# Altium PCB Sensor_PCB_S201.PcbDoc
Units mil, origin at the board's own origin, x right, y up, seen from the top; angles counter-clockwise.
Board outline 787.4 x 787.4 mil, 2 copper layers (1-SIG-TOP, 2-SIG_BOT), stack 31.496 mil thick; 38 components, 17 nets, 86 pads, 32 vias.
Unrouted connection lines stored in the file: 44.
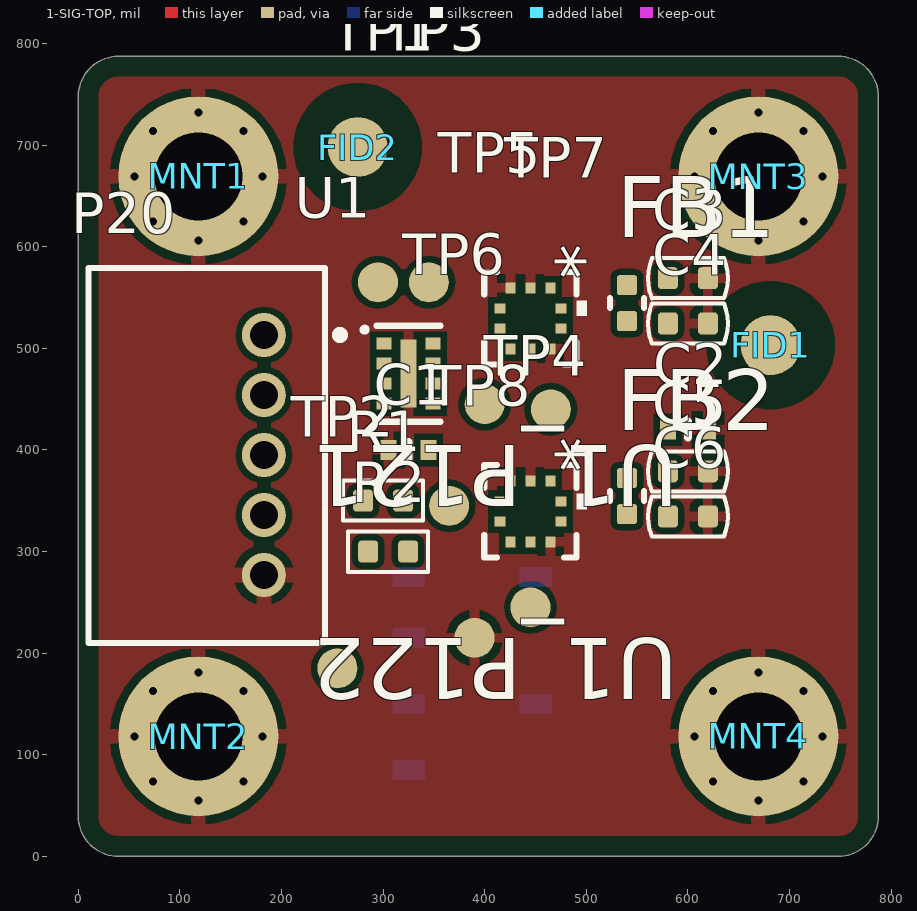
[diagram p0: 1-SIG-TOP view]
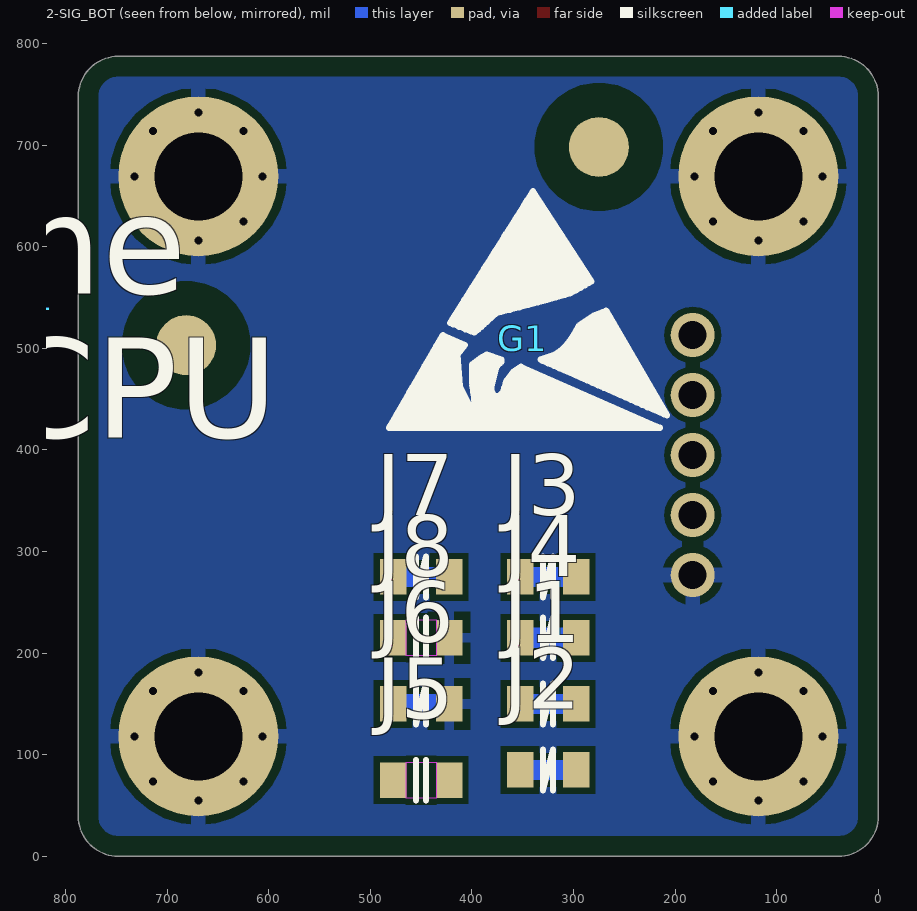
[diagram p1: 2-SIG_BOT view, seen from below]

## Layer stack, top to bottom
Top Solder: solder mask 0.3937, Solder Resist, Dk 3.5
1-SIG-TOP: signal copper 1.378
Dielectric 1: core 28.7402, FR-4, Dk 4.2
2-SIG_BOT: signal copper 1.378
Bottom Solder: solder mask 0.3937, Solder Resist, Dk 3.5

## Board outline
0,39.37 0,748.03 cw(c39.37,748.03) 39.37,787.4 748.03,787.4 cw(c748.03,748.03) 787.4,748.03 787.4,39.37 cw(c748.03,39.37) 748.03,0 39.37,0 cw(c39.37,39.37)

## Design rules (kind name [scope] priority, off if disabled: settings)
BoardOutlineClearance BoardOutlineClearance_LayerStack [WithinRoom('PCB_Stackup')] p1: gap=0 ignorepadtopadclearanceinfootprint=FALSE
BoardOutlineClearance BoardOutlineClearance_LayerNames [WithinRoom('Layer_Names')] p2: gap=0 ignorepadtopadclearanceinfootprint=FALSE
BoardOutlineClearance BoardOutlineClearance_uSD_Slot [HasFootprintPad('5025700893','0')] p3: gap=0 ignorepadtopadclearanceinfootprint=FALSE
BoardOutlineClearance BoardOutlineClearance_nanoSIM_Slot [HasFootprintPad('1042240820_MOL','G4') or HasFootprintPad('1042240820_MOL','G1') or ((ObjectKind = 'Fill') and HasFootprint('1042240820_MOL'))] p4: gap=0 ignorepadtopadclearanceinfootprint=FALSE
BoardOutlineClearance BoardOutlineClearance_Overlays [OnBottomSilkscreen or OnTopSilkscreen] p5: gap=0 ignorepadtopadclearanceinfootprint=FALSE
BoardOutlineClearance [All] p6: gap=19.68 ignorepadtopadclearanceinfootprint=FALSE
Clearance Clearance_InnerLayers [OnLayer('4-SIG-HOR') or OnLayer('5-SIG-VERT')] p1: gap=6 ignorepadtopadclearanceinfootprint=TRUE except(8: Arc-SMDPad Arc-THPad Arc-Via Arc-Hole Track-SMDPad Track-THPad Track-Via Track-Hole THPad-THPad THPad-Via THPad-Fill THPad-Poly THPad-Region THPad-Hole Via-Via Via-Fill Via-Poly Via-Region Via-Hole Fill-Hole Poly-Hole Region-Hole)
Clearance [All] p2: gap=6 ignorepadtopadclearanceinfootprint=FALSE
ComponentClearance ComponentClearance_NetTie [HasFootprint('Net Tie 6x30mil') vs not HasFootprint('Net Tie 6x30mil')] p1: gap=0 collisioncheckmode=3 verticalgap=0 showdistances=FALSE
ComponentClearance ComponentClearance_PCB_Stackup [WithinRoom('PCB_Stackup')] p2: gap=0 collisioncheckmode=3 verticalgap=0 showdistances=FALSE
ComponentClearance ComponentClearance_TagConnect [HasFootprint('TC2030-IDC-NL') or HasFootprint('TC2050-IDC-NL')] p3: gap=0 collisioncheckmode=3 verticalgap=0 showdistances=FALSE
ComponentClearance ComponentClearance_Displays [HasFootprint('QG-2864KSWEG01_FLIPPED') vs HasFootprint('CONN_0524352271')] p4: gap=0 collisioncheckmode=3 verticalgap=0 showdistances=FALSE
ComponentClearance [All] p5: gap=12 collisioncheckmode=3 verticalgap=40 showdistances=FALSE
DiffPairsRouting [All] p1: maxlimit=6 minlimit=5 mostfreqgap=6 toplayer_minwidth=5 toplayer_maxwidth=6 toplayer_prefwidth=6 bottomlayer_minwidth=5 bottomlayer_maxwidth=6 bottomlayer_prefwidth=6 maxuncoupledlength=500
HoleToHoleClearance [All] p1: gap=10 allowstackedmicrovias=FALSE
MatchedLengths MatchedLengths_QSPI [InNetClass('QSPI')] p1: tolerance=50 checknetsindiffpair=FALSE checkdiffpairvsdiffpair=TRUE checkxsignals=TRUE checkothers=TRUE
MinimumAnnularRing MinimumAnnularRing_Via_Int [IsVia and not (OnTopLayer or OnBottomLayer)] p1: minimumring=0
MinimumAnnularRing MinimumAnnularRing_USB-C_Conn [HasFootprint('632723300011')] p2: minimumring=4.82
MinimumAnnularRing MinimumAnnularRing_1 [All] p3: minimumring=6
MinimumSolderMaskSliver [All] p1: minsoldermaskwidth=3
PlaneClearance [All] p1: clearance=8
PlaneConnect PlaneConnect_Via [IsVia] p1: planeconnectstyle=Direct reliefexpansion=20 reliefentries=4 reliefconductorwidth=10 reliefairgap=10
PlaneConnect PlaneConnect_HeatTrap [All] p2: pad.planeconnectstyle=Relief pad.reliefexpansion=6 pad.reliefentries=4 pad.reliefconductorwidth=6 pad.reliefairgap=6 via.planeconnectstyle=Direct via.reliefexpansion=8 via.reliefentries=4 via.reliefconductorwidth=10 via.reliefairgap=10
PolygonConnect PolygonConnect_Via [IsVia] p1: connectstyle=Direct reliefconductorwidth=10 reliefentries=4 polygonreliefangle="90 Angle" airgapwidth=10
PolygonConnect PolygonConnect_TestPoints [InComponentClass('TestPoint')] p2: connectstyle=Direct reliefconductorwidth=10 reliefentries=4 polygonreliefangle="90 Angle" airgapwidth=10
PolygonConnect PolygonConnect_ThermPads [HasFootprintPad('DFN65P100X40-4N','5') or HasFootprintPad('WSON-6 065','7') or HasFootprintPad('SOT908-1','9')] p3: connectstyle=Direct reliefconductorwidth=10 reliefentries=4 polygonreliefangle="90 Angle" airgapwidth=10
PolygonConnect PolygonConnect_BG95_GND [HasFootprint('BG95') and (InNet('GND') or InNetClass('BG95_PWR'))] p4: connectstyle=Direct reliefconductorwidth=10 reliefentries=4 polygonreliefangle="90 Angle" airgapwidth=10
PolygonConnect [All] p5: thpad.connectstyle=Relief thpad.reliefconductorwidth=15 thpad.reliefentries=4 thpad.polygonreliefangle="90 Angle" thpad.airgapwidth=8 smdpad.connectstyle=Relief smdpad.reliefconductorwidth=10 smdpad.reliefentries=4 smdpad.polygonreliefangle="90 Angle" smdpad.airgapwidth=8 via.connectstyle=Direct via.reliefconductorwidth=10 via.reliefentries=4 via.polygonreliefangle="90 Angle" via.airgapwidth=10
RoomDefinition P122 [InComponentClass('P122')] p1: confinementstyle=ConfineIn formatcopy=TRUE lockcomponents=FALSE outline 655,430 375,430 375,270 655,270
RoomDefinition P121 [InComponentClass('P121')] p2: confinementstyle=ConfineIn formatcopy=TRUE lockcomponents=FALSE outline 655,620 375,620 375,460 655,460
RoutingVias [All] p1: holewidth=5.91 width=19.68 viastyle="Through Hole" minholewidth=5.91 minwidth=19.68 maxholewidth=19.68 maxwidth=27.56
SilkToSilkClearance [All] p1: silktosilkclearance=1
SilkToSolderMaskClearance [IsPad] p1: minsilkscreentomaskgap=4 clearancetoexposedcopper=FALSE
SolderMaskExpansion [All] p1: expansion=2
Width [All] p1: maxlimit=200 minlimit=6 preferedwidth=10
22 further rules are at their usual default settings.

## Classes and differential pairs
channel class BMP388_Digital_Pressure_Sensor: P121 P122
component class P122: C5 C6 FB2 U1_P122
component class P121: C3 C4 FB1 U1_P121

## Components (designator, comment, footprint, x,y, rotation, side; value= is the part's Value field where it differs from the comment)
C1 "CAP CER 0.1UF 50V X7R 0402" CAP_0402 325,400 r180 top
C2 "CAP CER 1UF 6.3V X5R 0402" CAP_0402 600,420 r180 top
C3 "CAP CER 0.1UF 16V X7R 0402" 0402C 600,568.98 r180 top (schematic designator C1)
C4 "CAP CER 0.1UF 16V X7R 0402" 0402C 600,524.49 r0 top (schematic designator C2)
C5 "CAP CER 0.1UF 16V X7R 0402" 0402C 600,378.98 r180 top (schematic designator C1)
C6 "CAP CER 0.1UF 16V X7R 0402" 0402C 600,334.49 r0 top (schematic designator C2)
FB1 "FERRITE BEAD 1 KOHM 0402 1LN" L_0402 540,544.49 r270 top
FB2 "FERRITE BEAD 1 KOHM 0402 1LN" L_0402 540,354.49 r270 top (schematic designator FB1)
FID1 "N/A" FIDUCIAL 681.3,503.15 r0 top
FID2 "N/A" FIDUCIAL 275,698.15 r90 top
G1 "Logo_ESD" LOGO_ESD 350,510 r180 bottom
J1 "NC Bridge" NC_SolderBridge_0603 325,150 r180 bottom net-tie
J2 "NC Bridge" NC_SolderBridge_0603 325,85 r180 bottom net-tie
J3 "NC Bridge" NC_SolderBridge_0603 325,275 r180 bottom net-tie
J4 "NC Bridge" NC_SolderBridge_0603 325,215 r180 bottom net-tie
J5 "NO Bridge" NO_SolderBridge_0603 450,75 r180 bottom
J6 "NC Bridge" NC_SolderBridge_0603 450,150 r0 bottom net-tie
J7 "NC Bridge" NC_SolderBridge_0603 450,275 r180 bottom net-tie
J8 "NO Bridge" NO_SolderBridge_0603 450,215 r0 bottom
Logo1 "Logo ACME_CPU" LOGO_ACME_CPU 865,550 r180 bottom (schematic designator Logo)
MNT1 "MountHole M2. Nothing to buy or mount" MOUNTHOLE_M2 118.11,669.29 r0 top
MNT2 "MountHole M2. Nothing to buy or mount" MOUNTHOLE_M2 118.11,118.11 r0 top
MNT3 "MountHole M2. Nothing to buy or mount" MOUNTHOLE_M2 669.29,669.29 r0 top
MNT4 "MountHole M2. Nothing to buy or mount" MOUNTHOLE_M2 669.29,118.11 r0 top
P20 "S201" CONN_S5B-ZR(LF)(SN) 100,395 r270 top
R1 "RES SMD 0 OHM JUMPER 1/16W 0402" 0402R 300,350 r180 top
R2 "DNP*" 0402R 305,300 r0 top
TP1 "Test Point Pad" TESTPOINT 295,565 r90 top
TP2 "Test Point Pad" TESTPOINT 255,185 r90 top
TP3 "Test Point Pad" TESTPOINT 345,565 r90 top
TP4 "Test Point Pad" TESTPOINT 445,245 r90 top
TP5 "Test Point Pad" TESTPOINT 400,445 r90 top
TP6 "Test Point Pad" TESTPOINT 365,345 r90 top
TP7 "Test Point Pad" TESTPOINT 465,440 r90 top
TP8 "Test Point Pad" TESTPOINT 390,215 r90 top
U1 "TPD3F303DPVR" DPV8_1P7X0P4 325,475 r0 top
U1_P121 "BMP388" QFN_BMP388_BOS 445,529.49 r270 top (schematic designator U1)
U1_P122 "BMP388" QFN_BMP388_BOS 445,339.49 r270 top (schematic designator U1)

## Footprints (in the part's own frame and the unit in brackets; to place one, negate y for a bottom-side part, rotate by r counter-clockwise, add the part's x,y. Pads: shape width x height; smd on the part's side, far side on the other; paste and mask are expansions set on the pad)
0402C [mm]
  rrect35% 0.5x0.55 smd: 1(-0.5,0) 2(0.5,0)
  silkscreen extent -1,-0.5 1,0.5, body extent -0.52,-0.28 0.52,0.28, height 0.55
0402R [mm]
  rrect35% 0.5x0.55 smd: 1(-0.5,0) 2(0.5,0)
  silkscreen extent -1,-0.51 1,0.5, body extent -0.53,-0.25 0.53,0.25, height 0.71
CAP_0402 [mm]
  rect 0.4x0.5 smd: 1(-0.5,0) 2(0.5,0)
  silkscreen extent 0,-0.2 0,0.2, body extent -0.5,-0.25 0.5,0.25, height 0.5
CONN_S5B-ZR(LF)(SN) [mm] "CONN HEADER R/A 5POS 1.5MM"
  round 1.1 hole 0.7: 1(-3,2.1) 2(-1.5,2.1) 3(0,2.1) 4(1.5,2.1) 5(3,2.1)
  silkscreen extent -4.67,-2.29 4.7,4.1, body extent -4.5,-2.5 4.5,3.5, height 3.8
DPV8_1P7X0P4 [mm]
  rect 0.38x0.3 smd paste+0 mask+0.05: 1(-0.61,0.75) 2(-0.61,0.25) 3(-0.61,-0.25) 4(-0.61,-0.75) 5(0.61,-0.75) 6(0.61,-0.25) 7(0.61,0.25) 8(0.61,0.75)
  rect 0.4x1.7 smd paste-0.837 mask+0.05: 9(0,0)
  silkscreen extent -1.15,-1.2 0.8,1.2, body extent -0.8,-1.05 0.8,1.05, height 0.65
FIDUCIAL [mm]
  round 1.5 smd paste-100 mask+0.75: ""(0,0)
  round 1.5 smd far side paste-100 mask+0.75: ""(0,0)
  1-SIG-TOP pour cut-out: 0,1.6 0.158,1.6 0.467,1.538 0.758,1.418 1.02,1.243 1.243,1.02 1.418,0.758 1.538,0.467 1.6,0.158 1.6,0 1.6,0 1.6,-0.158 1.538,-0.467 1.418,-0.758 1.243,-1.02 1.02,-1.243 0.758,-1.418 0.467,-1.539 0.158,-1.6 0,-1.6 -0.158,-1.6 -0.467,-1.538 -0.758,-1.418 -1.02,-1.243 -1.243,-1.02 -1.418,-0.758 -1.538,-0.467 -1.6,-0.158 -1.6,0 -1.6,0.158 -1.538,0.467 -1.418,0.758 -1.243,1.02 -1.02,1.243 -0.758,1.418 -0.467,1.538 -0.158,1.6 0,1.6
  2-SIG_BOT pour cut-out: 0,1.6 0.158,1.6 0.467,1.538 0.758,1.418 1.02,1.243 1.243,1.02 1.418,0.758 1.538,0.467 1.6,0.158 1.6,0 1.6,-0.158 1.538,-0.467 1.418,-0.758 1.243,-1.02 1.02,-1.243 0.758,-1.418 0.467,-1.539 0.158,-1.6 0,-1.6 -0.158,-1.6 -0.467,-1.538 -0.758,-1.418 -1.02,-1.243 -1.243,-1.02 -1.418,-0.758 -1.538,-0.467 -1.6,-0.158 -1.6,0 -1.6,0.158 -1.538,0.467 -1.418,0.758 -1.243,1.02 -1.02,1.243 -0.758,1.418 -0.467,1.538 -0.158,1.6 0,1.6
  body extent -1.49,-1.5 1.5,1.5
L_0402 [mm]
  rrect25% 0.5x0.5 smd: 1(-0.45,0) 2(0.45,0)
  silkscreen extent -0.13,-0.43 0.13,0.43, body extent -0.5,-0.25 0.5,0.25, height 0.5
LOGO_ACME_CPU [mil]
LOGO_ESD [mil] "Silk only"
  silkscreen extent -131,-88 142,145
MOUNTHOLE_M2 [mm] "Mount Hole M2"
  round 4 hole 2.2 paste-2 mask-2: 1(0,0)
  body extent -2,-2 2,2
NC_SolderBridge_0603 [mil]
  rect 26x35 smd: 1(-27.56,0) 2(27.56,0)
  1-SIG-TOP region: -16,10 16,10 16,-10 -16,-10
  silkscreen extent -5,-20 5,20
NO_SolderBridge_0603 [mil]
  rect 26x35 smd: 1(-27.56,0) 2(27.56,0)
  1-SIG-TOP keep-out region: -14.75,17.72 14.77,17.72 14.77,-17.72 -14.75,-17.72
  silkscreen extent -5,-20 5,20
QFN_BMP388_BOS [mil]
  rect 10x11 smd paste+0 mask+0: 1(-9.84,30) 2(9.84,30) 6(9.84,-30) 7(-9.84,-30)
  rect 11x10 smd paste+0 mask+0: 3(30,19.69) 4(30,0) 5(30,-19.69) 8(-30,-19.69) 9(-30,0) 10(-30,19.69)
  silkscreen extent -46,-46 46,56, body extent -41,-41 41,41, height 32
TESTPOINT [mm] "Test Point"
  round 1 smd paste-0.508 mask-0.025: 1(0,0)
  body extent -0.5,-0.5 0.5,0.5

## Part data
C1: "0.1µF ±10% 50V Ceramic Capacitor X7R 0402 (1005 Metric)", Capacitance=100nF, Case/Package=0402, Case Code (Metric)=1005, Dielectric=X7R, Manufacturer=TDK, Manufacturer Part Number=CGA2B3X7R1H104K050BB, Max Operating Temperature=125°C, Min Operating Temperature=-55°C, Package Quantity=1, Ratings=AEC-Q200, Supplier Part Number 1=445-6899-1-ND, Tolerance=10%, Voltage=50V, Case Code (Imperial)=0402, ComponentLink1Description=http://product.tdk.com/capacitor/mlcc/en/documents/mlccspec_automotive_general_midvoltage_en.pdf?src-supplier=Future+Electronics, ComponentLink1URL=http://product.tdk.com/capacitor/mlcc/en/documents/mlccspec_automotive_general_midvoltage_en.pdf?src-supplier=Future+Electronics, ComponentLink2Description=http://www.farnell.com/datasheets/1807242.pdf?src-supplier=Element14, ComponentLink2URL=http://www.farnell.com/datasheets/1807242.pdf?src-supplier=Element14, ComponentLink3Description=http://www.mouser.com/ds/2/400/lcc_automotive_general_en-843974.pdf?src-supplier=Mouser, ComponentLink3URL=http://www.mouser.com/ds/2/400/lcc_automotive_general_en-843974.pdf?src-supplier=Mouser, ComponentLink4Description=http://www.farnell.com/datasheets/1936565.pdf?src-supplier=Element14, ComponentLink4URL=http://www.farnell.com/datasheets/1936565.pdf?src-supplier=Element14, ComponentLink5Description=http://www.farnell.com/datasheets/1735392.pdf?src-supplier=Element14, ComponentLink5URL=http://www.farnell.com/datasheets/1735392.pdf?src-supplier=Element14, Composition=Ceramic, Depth=0.5mm, Height=0.5mm, Lead Free="Lead Free", Length=1mm, Mount="Surface Mount", Packaging="Tape and Reel", Pricing 1="1=0.17, 10=0.118, 50=0.0668, 100=0.0553, 500=0.0388, 1000=0.0321, 2500=0.0299, 5000=0.0273 (USD)", REACH SVHC="No SVHC", Stock 1=2925303, Supplier 1=Digi-Key, Termination=SMD/SMT, Thickness=0.022inch, Voltage Rating=50V, Voltage Rating (DC)=50V, Weight=2.3E-05oz, Width=0.02inch
C2: "1µF ±10% 6.3V Ceramic Capacitor X5R 0402 (1005 Metric)", Capacitance=1uF, Case/Package=0402, Case Code (Metric)=1005, Dielectric=X5R, Dielectric Material=Ceramic, Manufacturer=Yageo, Manufacturer Part Number=CC0402KRX5R5BB105, Max Operating Temperature=85°C, Min Operating Temperature=-55°C, Package Quantity=1, Supplier Part Number 1=311-1438-1-ND, Tolerance=10%, Voltage Rating=6.3V, Case Code (Imperial)=0402, ComponentLink1Description=http://www.farnell.com/datasheets/70765.pdf?src-supplier=Farnell, ComponentLink1URL=http://www.farnell.com/datasheets/70765.pdf?src-supplier=Farnell, ComponentLink2Description=http://www.yageo.com/documents/recent/UPY-GPHC_X5R_4V-to-50V_25.pdf?src-supplier=Digi-Key, ComponentLink2URL=http://www.yageo.com/documents/recent/UPY-GPHC_X5R_4V-to-50V_25.pdf?src-supplier=Digi-Key, ComponentLink3Description=http://www.farnell.com/datasheets/2167237.pdf?src-supplier=Element14, ComponentLink3URL=http://www.farnell.com/datasheets/2167237.pdf?src-supplier=Element14, ComponentLink4Description=http://www.yageo.com/documents/recent/UPY-GPHC_X5R_4V-to-50V_12.pdf?src-supplier=Avnet+Europe, ComponentLink4URL=http://www.yageo.com/documents/recent/UPY-GPHC_X5R_4V-to-50V_12.pdf?src-supplier=Avnet+Europe, ComponentLink5Description=http://www.farnell.com/datasheets/1359354.pdf?src-supplier=Element14, ComponentLink5URL=http://www.farnell.com/datasheets/1359354.pdf?src-supplier=Element14, ComponentLink6Description=http://www.farnell.com/datasheets/70765.pdf?src-supplier=Element14, ComponentLink6URL=http://www.farnell.com/datasheets/70765.pdf?src-supplier=Element14, ComponentLink7Description=http://www.yageo.com/documents/recent/UPY-GPHC_X5R_4V-to-50V_12.pdf?src-supplier=Avnet, ComponentLink7URL=http://www.yageo.com/documents/recent/UPY-GPHC_X5R_4V-to-50V_12.pdf?src-supplier=Avnet, Composition=Ceramic, Depth=0.5mm, Halogen Free="Halogen Free", Height=0.5mm, Lead Free="Lead Free", Length=1mm, Mount="Surface Mount", Number of Pins=2, Packaging="Tape and Reel", Pricing 1="1=0.1, 10=0.05, 50=0.0272, 100=0.0222, 500=0.0158, 1000=0.0124, 2500=0.0113, 5000=0.0104 (USD)", Radiation Hardening=No, REACH SVHC="No SVHC", Stock 1=34926286, Supplier 1=Digi-Key, Termination=SMD/SMT, Thickness=0.022inch, Voltage Rating (DC)=6.3V, Width=0.02inch
C3 C4 C5 C6: "0.1µF ±10% 16V Ceramic Capacitor X7R 0402 (1005 Metric)", Capacitance=100nF, Case Code (Imperial)=0402, Case Code (Metric)=1005, Dielectric=X7R, Manufacturer=YAGEO, Manufacturer Part Number=CC0402KRX7R7BB104, Max Operating Temperature=125°C, Min Operating Temperature=-55°C, Package Quantity=1, Supplier Part Number 1=311-1338-1-ND, Tolerance=10%, Voltage=16V, ComponentLink1Description=http://www.yageo.com/documents/recent/UPY-GPHC_X7R_6.3V-to-50V_8.pdf?src-supplier=Avnet+Europe, ComponentLink1URL=http://www.yageo.com/documents/recent/UPY-GPHC_X7R_6.3V-to-50V_8.pdf?src-supplier=Avnet+Europe, ComponentLink2Description=http://www.yageo.com/documents/recent/UPY-GPHC_X7R_6.3V-to-50V_18.pdf?src-supplier=Digi-Key, ComponentLink2URL=http://www.yageo.com/documents/recent/UPY-GPHC_X7R_6.3V-to-50V_18.pdf?src-supplier=Digi-Key, ComponentLink3Description=http://www.yageo.com/documents/recent/UPY-GPHC_X7R_6.3V-to-50V_8.pdf?src-supplier=Avnet, ComponentLink3URL=http://www.yageo.com/documents/recent/UPY-GPHC_X7R_6.3V-to-50V_8.pdf?src-supplier=Avnet, ComponentLink4Description=http://www.yageo.com/documents/recent/UPY-GPHC_X7R_6.3V-to-50V_18.pdf?src-supplier=Mouser, ComponentLink4URL=http://www.yageo.com/documents/recent/UPY-GPHC_X7R_6.3V-to-50V_18.pdf?src-supplier=Mouser, ComponentLink5Description=http://www.farnell.com/datasheets/2167236.pdf?src-supplier=Element14, ComponentLink5URL=http://www.farnell.com/datasheets/2167236.pdf?src-supplier=Element14, ComponentLink6Description=http://www.farnell.com/datasheets/1489800.pdf?src-supplier=Element14, ComponentLink6URL=http://www.farnell.com/datasheets/1489800.pdf?src-supplier=Element14, Composition=Ceramic, Depth=0.5mm, Halogen Free="Halogen Free", Height=0.5mm, Lead Free="Lead Free", Length=1mm, Mount="Surface Mount", Number of Pins=2, Order=CC0402KRX7R7BB104, Packaging="Tape and Reel", Pricing 1="1=0.1, 10=0.031, 100=0.0136, 500=0.0097, 1000=0.0077, 2500=0.007, 5000=0.0064 (USD)", Radiation Hardening=No, REACH SVHC="No SVHC", Revision="July-2002: Re-released for DXP Platform.", Stock 1=25916830, Supplier 1=Digi-Key, Termination=SMD/SMT, Thickness=0.022inch, Voltage Rating=16V, Voltage Rating (DC)=16V, Width=0.02inch
FB1 FB2: "1 kOhms @ 100MHz 1  Ferrite Bead 0402 (1005 Metric) 350mA 490mOhm", Case/Package=0402, Case Code (Metric)=1005, Current Rating=350mA, DC Resistance (DCR)=490mR, Manufacturer=Murata, Manufacturer Part Number=BLM15AX102SN1D, Max Operating Temperature=125°C, Min Operating Temperature=-55°C, Package Quantity=1, Supplier Part Number 1=490-5442-1-ND, Test Frequency=100MHz, Tolerance=25%, Case Code (Imperial)=0402, ComponentLink1Description=https://www.murata.com/en-us/products/productdata/8796740059166/ENFA0018.pdf?src-supplier=Digi-Key, ComponentLink1URL=https://www.murata.com/en-us/products/productdata/8796740059166/ENFA0018.pdf?src-supplier=Digi-Key, ComponentLink2Description=http://search.murata.co.jp/Ceramy/image/img/PDF/ENG/L0110S0100BLM15AX_SN.pdf?src-supplier=Future+Electronics, ComponentLink2URL=http://search.murata.co.jp/Ceramy/image/img/PDF/ENG/L0110S0100BLM15AX_SN.pdf?src-supplier=Future+Electronics, ComponentLink3Description=http://www.produktinfo.conrad.com/datenblaetter/1100000-1199999/001171674-da-01-en-CHIP_DROSSEL0402_1000R_350MA_1_0X0_5MM.pdf?src-supplier=Conrad, ComponentLink3URL=http://www.produktinfo.conrad.com/datenblaetter/1100000-1199999/001171674-da-01-en-CHIP_DROSSEL0402_1000R_350MA_1_0X0_5MM.pdf?src-supplier=Conrad, ComponentLink4Description=http://www.produktinfo.conrad.com/datenblaetter/1100000-1199999/001172166-da-01-en-DROSSEL_0402_1000R_31_0X0_5MM_10000ST.pdf?src-supplier=Conrad, ComponentLink4URL=http://www.produktinfo.conrad.com/datenblaetter/1100000-1199999/001172166-da-01-en-DROSSEL_0402_1000R_31_0X0_5MM_10000ST.pdf?src-supplier=Conrad, Depth=0.5mm, Height=0.5mm, Impedance=1kR, Lead Free="Lead Free", Length=1mm, Material=Ferrite,Steel, Max Current Rating=350mA, Max DC Current=350mA, Number of Circuits=1, Number of Lines=1, Number of Pins=2, Packaging="Tape and Reel", Pricing 1="1=0.11, 10=0.09, 25=0.0812, 50=0.0596, 100=0.0514, 250=0.0406, 500=0.0343, 1000=0.0289, 5000=0.0257 (USD)", REACH SVHC="No SVHC", Stock 1=138597, Supplier 1=Digi-Key, Termination=SMD/SMT, Width=0.5mm
FID1 FID2: library part Fiducial, "Fiducial mark.  There is nothing to buy or mount.", ClassName=FiducialMark, CompType=Fiducial, Manufacturer=N/A, Manufacturer Part Number=N/A, MountType=N/A, PackageReference=Fiducial
J1 J2 J3 J4 J6 J7: "NC PCB Bridge (May be opened by cutting the copper trace)"
J5 J8: "NO PCB Bridge (May be closed by a solder blob)"
MNT1 MNT2 MNT3 MNT4: library part MountHole_M2, "PCB Mount Hole. There is nothing to buy or mount."
P20: library part "CONN HEADER TH R/A 5POS 1.5MM", "Connector Header Through Hole, Right Angle 5 position 0.059\" (1.50mm)", Color=Natural, Contact Resistance=30mR, Current Rating=1A, Housing Color=Beige, Manufacturer=JST, Manufacturer Part Number=S5B-ZR(LF)(SN), Max Operating Temperature=85°C, Max Voltage Rating (AC)=50V, Min Operating Temperature=-25°C, Supplier Part Number 1=455-1672-ND, ComponentLink1Description=http://www.jst-mfg.com/product/pdf/eng/eZH.pdf?src-supplier=Digi-Key, ComponentLink1URL=http://www.jst-mfg.com/product/pdf/eng/eZH.pdf?src-supplier=Digi-Key, ComponentLink2Description=https://www.verical.com/server-webapp/html/getDatasheet?partID=640593&src-supplier=Verical, ComponentLink2URL=https://www.verical.com/server-webapp/html/getDatasheet?partID=640593&src-supplier=Verical, ComponentLink3Description=http://www1.futureelectronics.com/doc/JST/S5B-ZR(LF)(SN).pdf?src-supplier=Future+Electronics, ComponentLink3URL=http://www1.futureelectronics.com/doc/JST/S5B-ZR(LF)(SN).pdf?src-supplier=Future+Electronics, ComponentLink4Description=http://www.produktinfo.conrad.com/datenblaetter/725000-749999/741204-da-01-en-STIFTLEISTE_GEWINKELT_5_POL_RM1_5.pdf?src-supplier=Conrad, ComponentLink4URL=http://www.produktinfo.conrad.com/datenblaetter/725000-749999/741204-da-01-en-STIFTLEISTE_GEWINKELT_5_POL_RM1_5.pdf?src-supplier=Conrad, Connector Type="Male Pin", Contact Material=Brass,Tin, Contact Mating Length=0.094inch, Contact Plating=Tin,Copper, Depth=6mm, Fastening Type=Detent, Gender=Male, Height=7.2mm, Housing Material=Polyamide, Lead Free="Lead Free", Length=9mm, Max Current Rating=1A, Mount="Through Hole", Number of Contacts=5, Number of Pins=5, Number of Positions=5, Number of Rows=1, Orientation="Right Angle", Packaging=Bulk, pin_1=SCL, pin_2=SDA, pin_3=VDD, pin_4=GPIO, pin_5=GND, Pitch=1.5mm, Pricing 1="1=0.29, 10=0.272, 100=0.1889, 500=0.1598, 1000=0.1308, 5000=0.1162, 10000=0.1053 (USD)", Stock 1=41138, Supplier 1=Digi-Key, Termination=Press-Fit, Voltage Rating=50V, Width=3.5mm
R1: "0 Ohms Jumper 0.063W, 1/16W Chip Resistor 0402 (1005 Metric) Moisture Resistant Thick Film", Case/Package=0402, Case Code (Metric)=1005, Manufacturer=Yageo, Manufacturer Part Number=RC0402JR-070RL, Max Operating Temperature=155°C, Max Power Dissipation=63mW, Min Operating Temperature=-55°C, Package Quantity=1, Power Rating=62.5mW, Resistance="0 Ohm", Supplier Part Number 1=311-0.0JRCT-ND, Temperature Coefficient=200ppm/°C, Tolerance=5%, Voltage Rating=50V, Case Code (Imperial)=0402, ComponentLink1Description=http://www.yageo.com/documents/recent/PYu-RC_Group_51_RoHS_L_10.pdf?src-supplier=Digi-Key, ComponentLink1URL=http://www.yageo.com/documents/recent/PYu-RC_Group_51_RoHS_L_10.pdf?src-supplier=Digi-Key, ComponentLink2Description=http://www.yageo.com/documents/recent/PYu-RC0402_51_RoHS_L_6.pdf?src-supplier=Avnet+Europe, ComponentLink2URL=http://www.yageo.com/documents/recent/PYu-RC0402_51_RoHS_L_6.pdf?src-supplier=Avnet+Europe, ComponentLink3Description=http://www.farnell.com/datasheets/1018594.pdf?src-supplier=Element14, ComponentLink3URL=http://www.farnell.com/datasheets/1018594.pdf?src-supplier=Element14, ComponentLink4Description=https://www.verical.com/server-webapp/html/getDatasheet?partID=326379&src-supplier=Verical, ComponentLink4URL=https://www.verical.com/server-webapp/html/getDatasheet?partID=326379&src-supplier=Verical, ComponentLink5Description=http://www.farnell.com/datasheets/2167052.pdf?src-supplier=Element14, ComponentLink5URL=http://www.farnell.com/datasheets/2167052.pdf?src-supplier=Element14, Composition="Thick Film", Contact Plating=Tin,Matte, Depth=0.5mm, Features="Moisture Resistant", Height=0.016inch, Lead Free="Lead Free", Length=1mm, Military Standard=Not, Number of Terminations=2, Packaging="Tape and Reel", Pricing 1="1=0.1, 10=0.013, 25=0.0092, 50=0.0072, 100=0.0053, 250=0.004, 500=0.0032, 1000=0.0024, 5000=0.0017 (USD)", Radiation Hardening=No, REACH SVHC=Unknown, Stock 1=46057148, Supplier 1=Digi-Key, Termination=SMD/SMT, Width=0.02inch
R2: library part "RES SMD NO BOM 0402", "Placeholder for a 0402 resistor", Case/Package=0402
TP1 TP2 TP3 TP4 TP5 TP6 TP7 TP8: "Test Point. There is nothing to buy or mount.", Manufacturer=N/A, ClassName=TestPoint, CompType=TestPoint, MountType=N/A, PackageReference=TetsPoint, PartNumber=N/A
U1: library part "FILTER RC(PI) ESD SMD  8-UFDFN EP", "RC (Pi) EMI Filter 2nd Order Low Pass 3 Channel R = 47Ohms, 100Ohms, C = 20pF  8-UFDFN Exposed Pad", Capacitance=20pF, Case/Package=SMD/SMT, Clamping Voltage=10V, Frequency=308MHz, Manufacturer="Texas Instruments", Max Operating Temperature=85°C, Min Operating Temperature=-40°C, Operating Supply Voltage=5.5V, Package Quantity=1, Supplier Part Number 1=296-28299-1-ND, ComponentLink1Description=http://www.ti.com/lit/ds/symlink/tpd3f303.pdf?src-supplier=Digi-Key, ComponentLink1URL=http://www.ti.com/lit/ds/symlink/tpd3f303.pdf?src-supplier=Digi-Key, ComponentLink2Description=http://focus.ti.com/lit/ds/symlink/tpd3f303.pdf?src-supplier=Avnet+Europe, ComponentLink2URL=http://focus.ti.com/lit/ds/symlink/tpd3f303.pdf?src-supplier=Avnet+Europe, ComponentLink3Description=https://www.verical.com/server-webapp/html/getDatasheet?partID=302817&src-supplier=Verical, ComponentLink3URL=https://www.verical.com/server-webapp/html/getDatasheet?partID=302817&src-supplier=Verical, ComponentLink4Description=http://www.farnell.com/datasheets/1558442.pdf?src-supplier=Element14, ComponentLink4URL=http://www.farnell.com/datasheets/1558442.pdf?src-supplier=Element14, Contact Plating=Gold, Depth=1.7mm, ESD Protection=Yes, Height=0.026inch, Lead Free="Lead Free", Length=2.2mm, Manufacturer Part Number=TPD3F303DPVR, Number of Channels=3, Number of Pins=8, Packaging="Tape and Reel", Pricing 1="1=0.85, 10=0.812, 25=0.7856, 50=0.6414, 100=0.576, 250=0.5236, 500=0.4974, 1000=0.4451 (USD)", Radiation Hardening=No, REACH SVHC="No SVHC", Stock 1=4896, Supplier 1=Digi-Key, Termination=Flat, Width=0.063inch
U1_P121 U1_P122: library part "IC BMP388 SENSOR PRESSURE ABS", "Pressure Sensor 4.35PSI ~ 18.13PSI (30kPa ~ 125kPa) Absolute   10-WFLGA", Capacitance=4.7uF, Case/Package=LGA, Case Code (Imperial)=0805, Case Code (Metric)=2012, Continuous Drain Current (ID)=4A, Drain to Source Voltage (Vdss)=30V, Input Capacitance=645pF, Manufacturer="Bosch Sensortec", Max Operating Temperature=150°C, Max Power Dissipation=1.4W, Min Operating Temperature=-55°C, Operating Pressure=18.13PSI, Ratings=AEC-Q200, Supplier Part Number 1=828-1079-1-ND, Tolerance=20%, Voltage Rating=16V, ComponentLink1Description=https://ae-bst.resource.bosch.com/media/_tech/media/datasheets/BST-BMP388-DS001.pdf?src-supplier=Digi-Key, ComponentLink1URL=https://ae-bst.resource.bosch.com/media/_tech/media/datasheets/BST-BMP388-DS001.pdf?src-supplier=Digi-Key, ComponentLink2Description=https://ae-bst.resource.bosch.com/media/_tech/media/product_flyer/BST-BMP388-FL000-00.pdf?src-supplier=Digi-Key, ComponentLink2URL=https://ae-bst.resource.bosch.com/media/_tech/media/product_flyer/BST-BMP388-FL000-00.pdf?src-supplier=Digi-Key, ComponentLink3Description=https://ae-bst.resource.bosch.com/media/_tech/media/application_notes/BST-BMP380-HS000.pdf?src-supplier=Digi-Key, ComponentLink3URL=https://ae-bst.resource.bosch.com/media/_tech/media/application_notes/BST-BMP380-HS000.pdf?src-supplier=Digi-Key, Features="Soft Termination", Manufacturer Part Number=BMP388, Mount="Surface Mount", Number of Pins=10, Output Type=SPI,I2C, Packaging="Tape and Reel", Port Style="No Port", Pressure Type=Absolute, Pricing 1="1=3.81, 5=3.366, 10=2.973, 25=2.4124, 50=2.1318, 100=2.0757, 500=1.7391, 1000=1.6269, 5000=1.5147 (USD)", Rds On Max=50mR, Stock 1=30816, Supplier 1=Digi-Key, Termination=SMD/SMT
Logo1: ClassName=PCB_FEATURE

## Via types
v1: diameter 21.65, hole 7.87, 1-SIG-TOP to 2-SIG_BOT, 32 vias

## Nets (pads, with @x,y where several pads share a name; then routed paths per layer and width w, separated by ;. In a path a pad name is that pad's centre, name@x,y a point inside that pad or via, vN(x,y) a via of type N, cw(c..) or ccw(c..) an arc to the next point about the centre after c; other vN are vias at no path point)
+3V3: C1.1 C2.2 C3.2 C5.2 FB1.1 FB2.1 J3.1 J4.1 J5.2 J7.2 P20.3 R2.2 TP7.1 U1.5 U1_P121.1 U1_P122.1
\INT: J1.1 J2.1 R2.1 TP6.1 U1.6
\P121.INT: J1.2 U1_P121.7
\P122.INT: J2.2 U1_P122.7
GND: C1.2 C2.1 C3.1 C4.2 C5.1 C6.2 J6.1 J8.1 MNT1.1 MNT2.1 MNT3.1 MNT4.1 P20.5 TP8.1 U1.9 U1_P121.3 U1_P121.8 U1_P121.9 U1_P122.3 U1_P122.8 U1_P122.9
  other v1: 118.11,55.12 669.29,55.12 73.57,73.57 162.65,73.57 624.75,73.57 713.83,73.57 55.12,118.11 181.1,118.11 606.3,118.11 732.28,118.11 73.57,162.65 162.65,162.65 624.75,162.65 713.83,162.65 118.11,181.1 669.29,181.1 118.11,606.3 669.29,606.3 73.57,624.75 162.65,624.75 624.75,624.75 713.83,624.75 55.12,669.29 181.1,669.29 606.3,669.29 732.28,669.29 73.57,713.83 162.65,713.83 624.75,713.83 713.83,713.83 118.11,732.28 669.29,732.28
I2C.SCL: TP5.1 U1.7 U1_P121.2 U1_P122.2
I2C.SDA: TP4.1 U1.8 U1_P121.4 U1_P122.4
NetC4_1: C4.1 FB1.2 U1_P121.10
NetC6_1: C6.1 FB2.2 U1_P122.10
NetJ3_2: J3.2 U1_P121.6
NetJ4_2: J4.2 U1_P122.6
NetR1_1: R1.1 U1.3
P20_GPIO: P20.4 R1.2 TP2.1
P20_SCL: P20.1 TP3.1 U1.2
P20_SDA: P20.2 TP1.1 U1.1
P121.A0: J5.1 J6.2 U1_P121.5
P122.A0: J7.1 J8.2 U1_P122.5
pads on no net: FID1. FID2. U1.4

## Polygon pours and split planes (outlines as drawn)
GND on 1-SIG-TOP "GND_L01_P112" (solid, pour order 112): 0,2755.91 3937.01,2755.91 3937.01,0 0,0
GND on 2-SIG_BOT "GND_L02_P131" (solid, pour order 131): 0,2755.91 3937.01,2755.91 3937.01,0 0,0

## Keep-outs
Keep-Out Layer:
  text "'.Layer_Name'" at 3740.16,98.43 h98.43

## Other copper
1-SIG-TOP:
  text "'.Layer_Name'" at 3740.16,1673.23 h98.43
2-SIG_BOT:
  text "'.Layer_Name'" at 4330.71,1574.8 h98.43

## Silkscreen, mask and mechanical layers (free items; w line width, h text height)
Top Overlay:
  text "'.Layer_Name'" at 3740.16,98.43 h98.43
Bottom Overlay:
  text "'.Layer_Name'" at 4330.71,0 h98.43
Top Paste:
  text "'.Layer_Name'" at 3740.16,688.98 h98.43
Bottom Paste:
  text "'.Layer_Name'" at 4330.71,590.55 h98.43
Top Solder:
  text "'.Layer_Name'" at 3740.16,492.13 h98.43
Bottom Solder:
  text "'.Layer_Name'" at 4330.71,393.7 h98.43
Drill Guide:
  text "'.Layer_Name'" at 3740.16,196.85 h98.43
Dimensions:
  text "'.Layer_Name'" at 3740.16,1377.95 h98.43
Fiducials:
  text "'.Layer_Name'" at 3740.16,1279.53 h98.43
Outline:
  the board outline again, w39.37
  text "'.Layer_Name'" at 3740.16,1181.1 h98.43
3D Body TOP:
  text "'.Layer_Name'" at 3740.16,1082.68 h98.43
TOP ASSY:
  text "'.Layer_Name'" at 3740.16,688.98 h98.43
Courtyard TOP:
  text "'.Layer_Name'" at 3740.16,984.25 h98.43
PCB Sheet:
  lines w27.56: -2396.85,-8984.25 -2396.85,2708.66 ; -2396.85,-6061.02 -2200,-6061.02 ; -2396.85,-3137.8 -2200,-3137.8 ; -2396.85,-214.57 -2200,-214.57 ; -2200,-7579.25 382.95,-7579.25 1882.95,-7579.25 4886.61,-7579.25 ; -699.72,-8787.4 -699.72,-7579.25 ; -699.72,-8479.25 4886.61,-8479.25 ; -699.72,-8179.25 4886.61,-8179.25 ; -699.72,-7879.25 4886.61,-7879.25 ; 164.96,-8984.25 164.96,-8787.4 ; 164.96,2511.81 164.96,2708.66 ; 1482.95,-8787.4 1482.95,-8179.25 1482.95,-7579.25 ; 2524.41,-8984.25 2524.41,-8787.4 ; 2524.41,2511.81 2524.41,2708.66 ; 3582.95,-8787.4 3582.95,-8179.25 ; 4886.61,-6061.02 5083.46,-6061.02 ; 4886.61,-3137.8 5083.46,-3137.8 ; 4886.61,-214.57 5083.46,-214.57 ; -3184.25,-8984.25 5083.46,-8984.25 5083.46,2708.66 -3184.25,2708.66 -3184.25,-8984.25 ; -2200,-8787.4 -2200,2511.81 4886.61,2511.81 4886.61,-8787.4 -2200,-8787.4
  text "1" at -1018.9,2570.87 h70
  text "2" at 1343.31,2570.87 h70
  text "3" at 3705.51,2570.87 h70
  text "A" at -2318.11,1148.62 h70
  text "A" at 4965.35,1148.62 h70
  text "'.Layer_Name'" at 3740.16,885.83 h98.43
  text "B" at -2318.11,-1774.61 h70
  text "B" at 4965.35,-1774.61 h70
  text "C" at -2318.11,-4697.83 h70
  text "C" at 4965.35,-4697.83 h70
  text "D" at -2318.11,-7542.32 h70
  text "D" at 4965.35,-7542.32 h70
  text "ENGINEER:" at -649.72,-7679.25 h45
  text "PROJECT NAME:" at 1532.95,-7679.25 h45
  text "'.ProjectName'" at 2075.2,-7803.15 h118.11
  text "'._HWEngineer'" at -554.76,-7812.78 h60
  text "PCB DESIGNER:" at -649.72,-7974.25 h45
  text "BOARD NAME:" at 1532.95,-7974.53 h45
  text "'._CompanyName'" at -2003.15,-8039.37 h70
  text "'._BoardName'" at 2075.2,-8108.27 h118.11
  text "'._HWEngineer'" at -559.76,-8117.78 h60
  text "'._address1'" at -2003.15,-8236.22 h70
  text "DATE:" at -649.72,-8279.25 h45
  text "PART NO.:" at 1532.95,-8279.25 h45
  text "Ver:" at 3632.95,-8279.25 h45
  text "'._address2'" at -2003.15,-8334.65 h70
  text "'._Revision'" at 3990.75,-8384.25 h118.11
  text "'._DocumentDate'" at -559.76,-8387.78 h70
  text "'._PCBModel'" at 2075.2,-8413.39 h118.11
  text "'._address3'" at -2003.15,-8433.07 h50
  text "'._address4'" at -2003.15,-8531.5 h50
  text "FILE NAME:" at -649.72,-8579.25 h45
  text "SCH. NO.:" at 1532.95,-8579.25 h45
  text "SCALE:" at 3632.95,-8579.25 h45
  text "A4 M1:1" at 4015.75,-8684.25 h118.11
  text "'.ProjectNumber'" at 2075.2,-8708.66 h118.11
  text "'.Pcb_File_Name_No_Path'" at -557.24,-8714.12 h70
  text "1" at -1018.9,-8925.2 h70
  text "2" at 1343.31,-8925.2 h70
  text "3" at 3705.51,-8925.2 h70
Drill Drawing:
  text "'.Layer_Name'" at 3740.16,-98.43 h98.43
  text ".Legend" at -2066.93,-7283.46 h137.8
Courtyard BOT:
  text "'.Layer_Name'" at 4330.71,787.4 h98.43
BOT ASSY:
  text "'.Layer_Name'" at 4330.71,295.28 h98.43
Layer Stack:
  drawing of 367 lines, arcs and shapes, not listed
  text "'.Layer_Name'" at 3740.16,-216.54 h98.43
  text "Layer" at -50.61,-1373.15 h60
  text "Name" at 359.3,-1373.15 h60
  text "Material" at 1289.05,-1373.15 h60
  text "Thickness" at 2148.82,-1373.15 h60
  text "Constant" at 2798.65,-1373.15 h60
  text "Board Layer Stack" at 3368.51,-1373.15 h60
  text "1" at -50.61,-1493.15 h60
  text "Top Overlay" at 359.3,-1493.15 h60
  text "2" at -50.61,-1613.15 h60
  text "Top Solder" at 359.3,-1613.15 h60
  text "Solder Resist" at 1289.05,-1613.15 h60
  text "0.010mm" at 2148.82,-1613.15 h60
  text "3.5" at 2798.65,-1613.15 h60
  text "3" at -50.61,-1733.15 h60
  text "1-SIG-TOP" at 359.3,-1733.15 h60
  text "Copper" at 1289.05,-1733.15 h60
  text "0.035mm" at 2148.82,-1733.15 h60
  text "4" at -50.61,-1853.15 h60
  text "Dielectric 1" at 359.3,-1853.15 h60
  text "FR-4" at 1289.05,-1853.15 h60
  text "0.730mm" at 2148.82,-1853.15 h60
  text "4.2" at 2798.65,-1853.15 h60
  text "5" at -50.61,-1973.15 h60
  text "2-SIG_BOT" at 359.3,-1973.15 h60
  text "Copper" at 1289.05,-1973.15 h60
  text "0.035mm" at 2148.82,-1973.15 h60
  text "6" at -50.61,-2093.15 h60
  text "Bottom Solder" at 359.3,-2093.15 h60
  text "Solder Resist" at 1289.05,-2093.15 h60
  text "0.010mm" at 2148.82,-2093.15 h60
  text "3.5" at 2798.65,-2093.15 h60
  text "7" at -50.61,-2213.15 h60
  text "Bottom Overlay" at 359.3,-2213.15 h60

## Dimensions
0,39.37 to 506.3,100 on Fiducials
0,748.03 to 275,698.15 on Fiducials
39.37,0 to 118.11,118.11 on Dimensions
0,748.03 to 118.11,118.11 on Dimensions
0,39.37 to 669.29,118.11 on Dimensions
39.37,787.4 to 681.3,503.15 on Fiducials
0,39.37 to 275,698.15 on Fiducials

## Text inside footprints (layer, text, board x,y; h text height)
Logo1: Bottom Overlay "Acme" at 1061.85,553.94 h98.43; Bottom Overlay "CPU" at 865,412.2 h98.43
P20: TOP ASSY "1" at 159.06,517.05 h40 r270; TOP ASSY "2" at 159.06,465.87 h40 r270; TOP ASSY "3" at 159.06,406.81 h40 r270; TOP ASSY "4" at 159.06,347.76 h40 r270; TOP ASSY "5" at 159.06,288.7 h40 r270
U1_P121: Top Overlay "*" at 449.53,602.49 h50 r270; 3D Body TOP "*" at 449.53,566.49 h50 r270
U1_P122: Top Overlay "*" at 449.53,412.49 h50 r270; 3D Body TOP "*" at 449.53,376.49 h50 r270